# EAGLE board A01 (EAGLE 9.7.0)

Size 108.16 x 53.25 mm. Coordinates in mm from the lower left corner, seen from the top.
Outline: 0,0 108.16,0 108.16,53.25 0,53.25 0,0
Copper layers (1*16): Top 0.035mm / dielectric 1.5mm / Bottom 0.035mm
Design rules "default": minimum track width 6mil, minimum drill 0.35mm, track to track 6mil, track to pad 6mil, pad to pad 6mil, via to via 6mil, smd to smd 6mil, copper to edge 40mil, drill to drill 6mil, minimum pad ring 10mil, minimum via ring 8mil, stop-mask expansion 4mil, vias tented up to drill 0mil, thermal gap 10mil

## Footprints (pad centres in the part's own frame; a part is rotated, then mirrored left to right if it is on the bottom)
BATTERY-GENERIC = drill 1.118 pad 3.15 octagon: + 2.54,0; - -2.54,0
LEDRD254W60D565H860B_B = drill 0.981 pad 1.581: 1 -1.27,0; 2 1.27,0
LEDRD254W60D565H860B = drill 0.981 pad 1.581: 1 -1.27,0; 2 1.27,0
RESAD1016W63L850D250B = drill 0.83 pad 1.43: 1 -5.08,0; 2 5.08,0
GL5528 = drill 0.8 pad 1.4: 1 -1.702,0; 2 1.702,0
HA-06-SM065 = drill 1 pad 1.676: 1 -2.54,-2.54; 2 0,2.54; 3 2.54,-2.54

## Placement (x,y rotation side)
BATPILON  9V  [BATTERY-GENERIC]  99.91,45 270 top
D1  BLUE  [LEDRD254W60D565H860B_B]  8.26,8.05 180 top
DGAY  RED  [LEDRD254W60D565H860B]  26.04,13.13 0 top
R1  1k  [RESAD1016W63L850D250B]  65.41,20.75 270 top
RFOTO  PHOTOCELL_GL5528  [GL5528]  5.71,15.67 0 top
RPOT1  250k  [HA-06-SM065]  37.47,15.67 0 top

## Library data of the parts
BATPILON R1 RFOTO RPOT1 = Tinkercad
D1 = Tinkercad; CATEGORY: Opto-Electronic; SUB-CATEGORY: LED; VALUE: LED_BLUE
DGAY = Tinkercad; CATEGORY: Opto-Electronic; SUB-CATEGORY: LED; VALUE: LED_RED

## Nets
BATPILON+: BATPILON.+ D1.1 DGAY.1
BATPILON-: BATPILON.- R1.1 RFOTO.1
D1_C: D1.2 RFOTO.2
DGAY_C: DGAY.2 RPOT1.2
R1_2: R1.2 RPOT1.3

## Tracks (layer width: path | path; a pad name or v marks a point on that pad's centre or on a via)
BATPILON+  (2 unrouted)
BATPILON-  (2 unrouted)
D1_C  (1 unrouted)
DGAY_C  (1 unrouted)
R1_2  (1 unrouted)